# Altium PCB motherboard2.PcbDoc
Units mil, origin at the board's own origin, x right, y up, seen from the top; angles counter-clockwise.
Board outline 2700 x 5200 mil, 2 copper layers (Top Layer, Bottom Layer); 45 components, 61 nets, 238 pads, 22 vias.
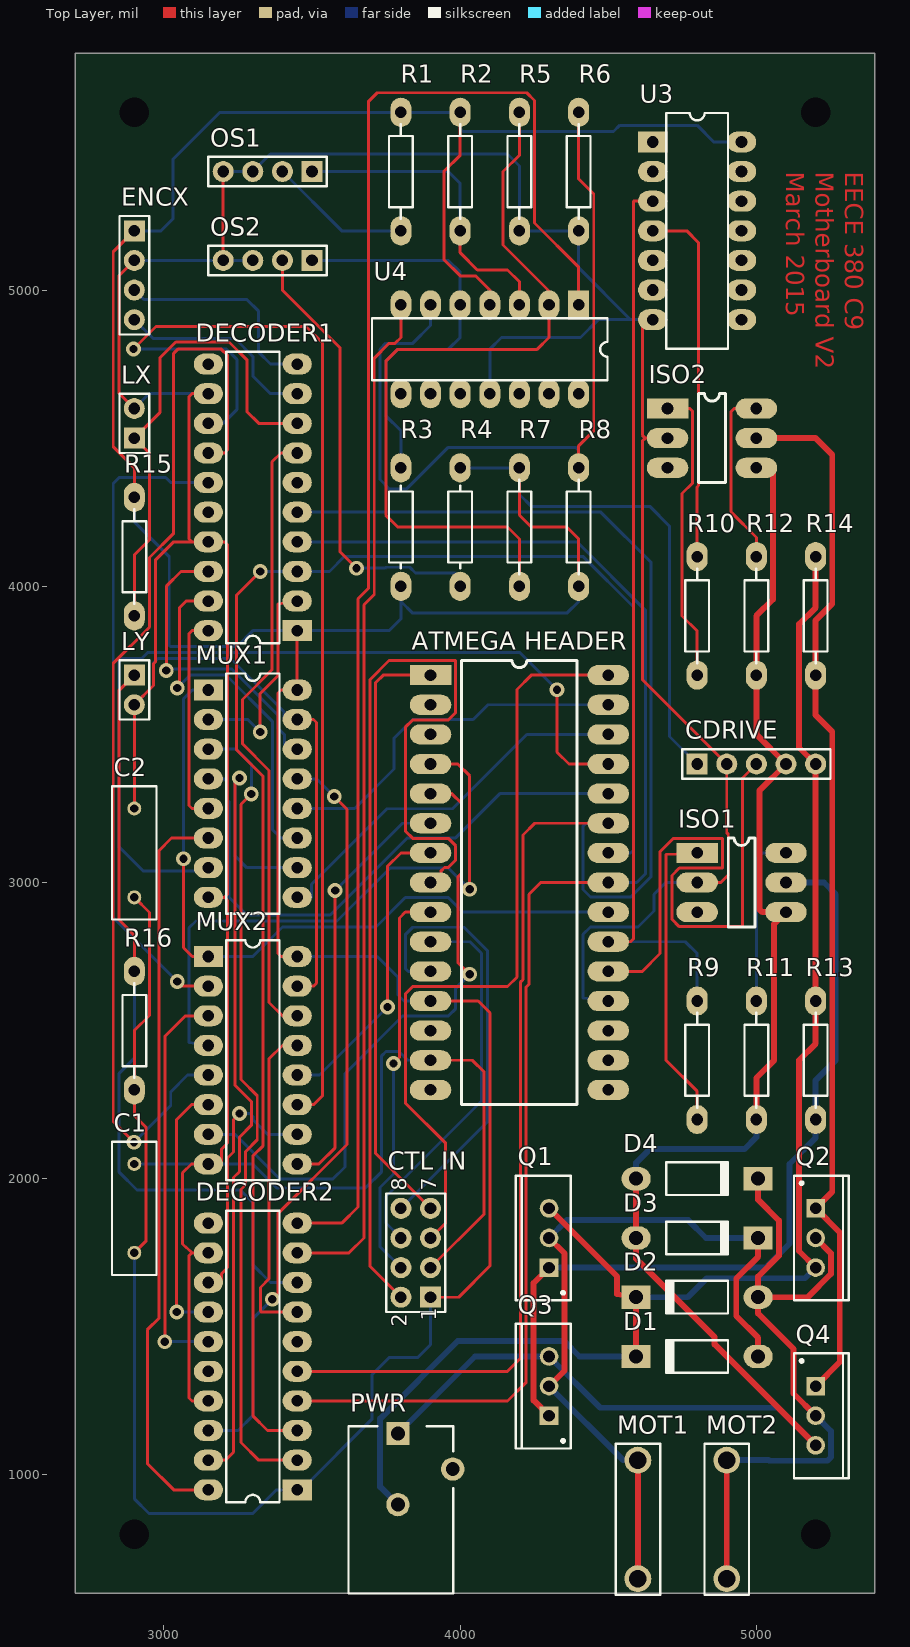
[diagram p0: Top Layer view]
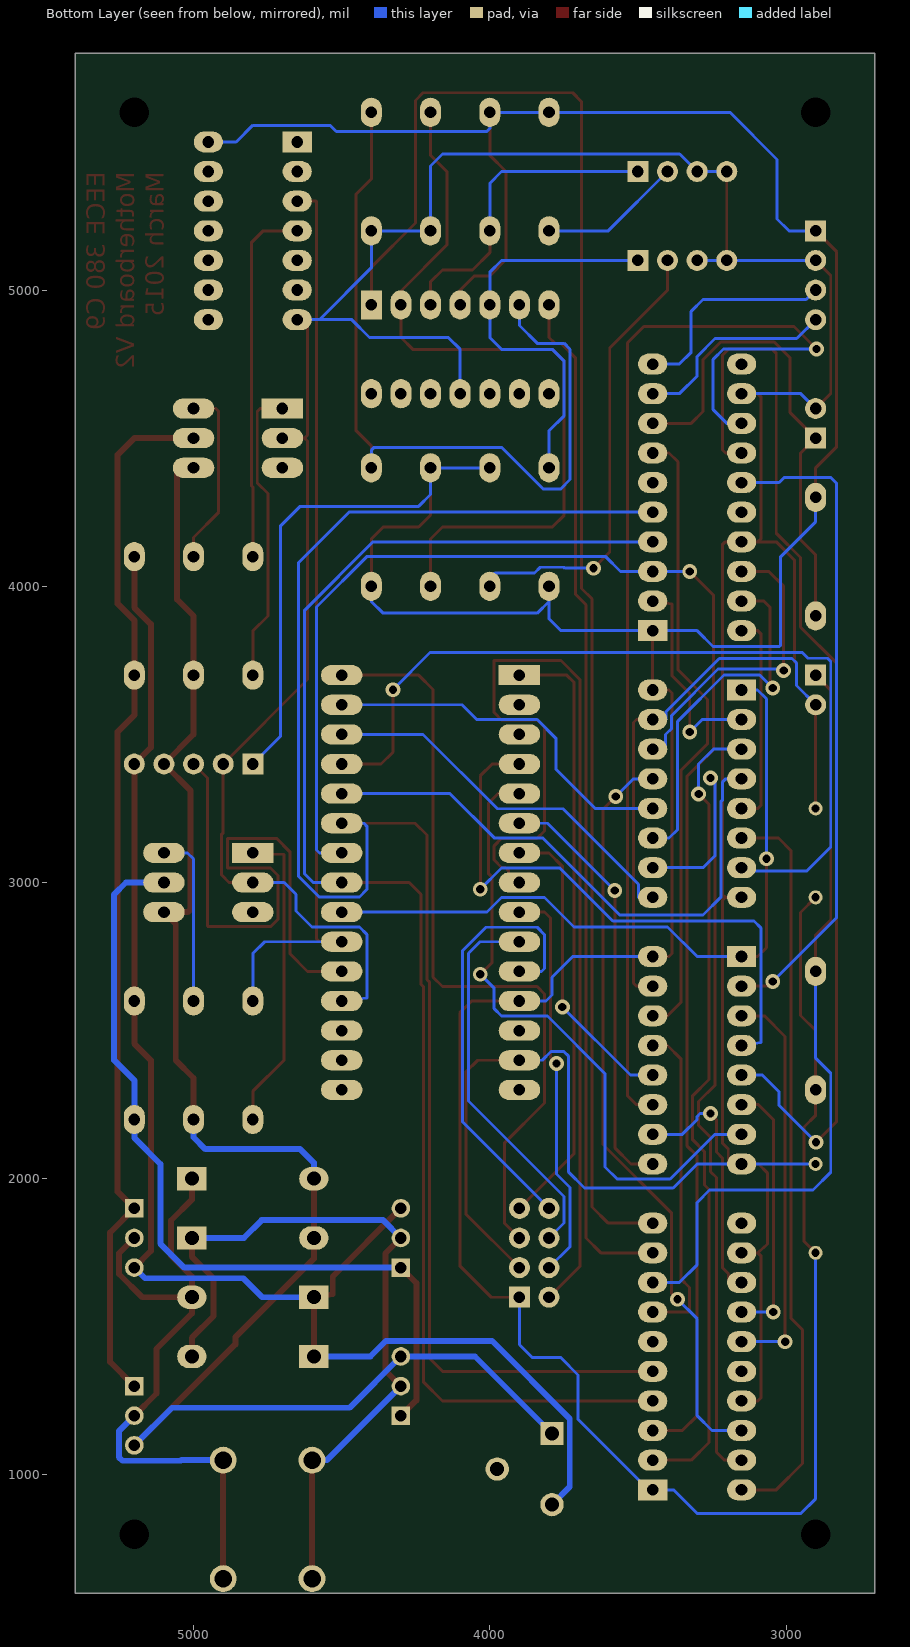
[diagram p1: Bottom Layer view, seen from below]

## Layer stack, top to bottom
Top Solder: solder mask 0.4, Solder Resist, Dk 3.5
Top Layer: signal copper 1.4
Dielectric 1: dielectric 12.6, FR-4, Dk 4.8
Bottom Layer: signal copper 1.4
Bottom Solder: solder mask 0.4, Solder Resist, Dk 3.5

## Board outline
2700,600 5400,600 5400,5800 2700,5800

## Design rules (kind name [scope] priority, off if disabled: settings)
Clearance [All] p1: gap=10
PolygonConnect [All] p1: connectstyle=Relief reliefconductorwidth=10 reliefentries=4 polygonreliefangle="90 Angle" airgapwidth=10
RoutingVias [All] p1: holewidth=28 width=50 viastyle="Through Hole" minholewidth=28 minwidth=50 maxholewidth=28 maxwidth=50
SolderMaskExpansion [All] p1: expansion=4
UnpouredPolygon [All] p1: allowunpoured=FALSE
Width POWPOWPOWER [InNet('VPOWER') or InNet('PGND') or InNet('HV1') or InNet('HV2') or InNet('SIG') or InNet('S\I\G\')] p1: maxlimit=20 minlimit=15 preferedwidth=20
Width [All] p2: maxlimit=10 minlimit=10 preferedwidth=10
29 further rules are at their usual default settings.

## Classes and differential pairs
component class opticalDecoder: OS1 OS2 R1 R2 R3 R4 R5 R6 R7 R8 U4
component class currentDriver: D1 D2 D3 D4 ISO1 ISO2 MOT1 MOT2 Q1 Q2 Q3 Q4 R9 R10 R11 R12 R13 R14 U3

## Components (designator, comment, footprint, x,y, rotation, side; value= is the part's Value field where it differs from the comment)
"ATMEGA HEADER" "NanoHeader" DIP30W 3900,3700 r0 top
C1 "" RAD-0.3 2900,1900 r270 top
C2 "" RAD-0.3 2900,3100 r270 top
CDRIVE "Commercial driver" HDR1X5_LGE1.0 4800,3400 r0 top
"CTL IN" "To arm controller" HDR2X4_LGE1.0 3900,1600 r90 top
D1 "1N4005" DO-41_XLGE1.2 4800,1400 r180 top
D2 "1N4005" DO-41_XLGE1.2 4800,1600 r180 top
D3 "1N4005" DO-41_XLGE1.2 4800,1800 r0 top
D4 "1N4005" DO-41_XLGE1.2 4800,2000 r0 top
DECODER1 "HCTL2022" N020D_LGE1.0 3300,4300 r90 top
DECODER2 "HCTL2022" N020D_LGE1.0 3300,1400 r90 top
ENCX "Encoder X" HDR1X4_LGE1.0 2900,5200 r270 top
ISO1 "4N35" DIP6LGE 4800,3100 r0 top
ISO2 "4N35" DIP6LGE 4700,4600 r0 top
LX "Limit switch X" HDR1X2_LGE1.0 2900,4500 r90 top
LY "Limit switch Y" HDR1X2_LGE1.0 2900,3700 r270 top
MOT1 "C-Ban" Ban1cm_2XLGE1.5 4600,900 r270 top
MOT2 "Ban" Ban1cm_2XLGE1.5 4900,900 r270 top
MUX1 "74HC257" DIP16_LGE1.0 3300,3300 r270 top
MUX2 "74HC257" DIP16_LGE1.0 3300,2400 r270 top
OS1 "C-Hdr1x4" HDR1X4_LGE1.0 3500,5400 r180 top
OS2 "C-Hdr1x4" HDR1X4_LGE1.0 3500,5100 r180 top
PWR "Power in" KLD_XLGE1.2 3800,600 r90 top
Q1 "T-PChan3.3" TO-220AB 4300,1800 r90 top
Q2 "T-PChan3.3" TO-220AB 5200,1800 r270 top
Q3 "T-NChan3.3" TO-220AB 4300,1300 r90 top
Q4 "T-NChan3.3" TO-220AB 5200,1200 r270 top
R1 "220" Res10mm_LGE1.0 3800,5400 r90 top
R2 "10K" Res10mm_LGE1.0 4000,5400 r90 top
R3 "10K" Res10mm_LGE1.0 3800,4200 r270 top
R4 "220" Res10mm_LGE1.0 4000,4200 r90 top
R5 "200K" Res10mm_LGE1.0 4200,5400 r90 top
R6 "200K" Res10mm_LGE1.0 4400,5400 r90 top
R7 "235K" Res10mm_LGE1.0 4200,4200 r90 top
R8 "235K" Res10mm_LGE1.0 4400,4200 r270 top
R9 "-Res" Res10mm_LGE1.0 4800,2400 r90 top
R10 "" Res10mm_LGE1.0 4800,3900 r90 top
R11 "G-Res" Res10mm_LGE1.0 5000,2400 r90 top
R12 "G-Res" Res10mm_LGE1.0 5000,3900 r90 top
R13 "G-Res" Res10mm_LGE1.0 5200,2400 r90 top
R14 "G-Res" Res10mm_LGE1.0 5200,3900 r90 top
R15 "" Res10mm_LGE1.0 2900,4100 r90 top
R16 "" Res10mm_LGE1.0 2900,2500 r270 top
U3 "D-Not" DIP14_LGE1.0 4800,5200 r270 top
U4 "O-OpAmp074" DIP14_LGE1.0 4100,4800 r180 top

## Footprints (in the part's own frame and the unit in brackets; to place one, negate y for a bottom-side part, rotate by r counter-clockwise, add the part's x,y. Pads: shape width x height; smd on the part's side, far side on the other; paste and mask are expansions set on the pad)
Ban1cm_2XLGE1.5 [mm] "Banana plug fem, Thru-Hole; 2 Leads"
  round 2.3 hole 1.5: 1(-3.81,0) 2(6.35,0)
  silkscreen extent -5.21,-1.91 7.75,1.91
DIP6LGE [mil]
  rect 140x68 hole 39.37: 1(0,0)
  oval 140x68 hole 39.37: 2(0,-100) 3(0,-200) 4(300,-200) 5(300,-100) 6(300,0)
  silkscreen extent 105,-250 195,50
DIP14_LGE1.0 [mm] "DIP; 14 Leads; Row Spacing 7.62 mm; Pitch 2.54 mm"
  rect 1.8x2.5 hole 1: 1(-7.62,-3.81)
  oval 1.8x2.5 hole 1: 2(-5.08,-3.81) 3(-2.54,-3.81) 4(0,-3.81) 5(2.54,-3.81) 6(5.08,-3.81) 7(7.62,-3.81) 8(7.62,3.81) 9(5.08,3.81) 10(2.54,3.81) 11(0,3.81) 12(-2.54,3.81) 13(-5.08,3.81) 14(-7.62,3.81)
  silkscreen extent -10.1,-2.65 10.1,2.65
DIP16_LGE1.0 [mm] "DIP; 16 Leads; Row Spacing 7.62 mm; Pitch 2.54 mm"
  rect 1.8x2.5 hole 1: 1(-8.89,-3.81)
  oval 1.8x2.5 hole 1: 2(-6.35,-3.81) 3(-3.81,-3.81) 4(-1.27,-3.81) 5(1.27,-3.81) 6(3.81,-3.81) 7(6.35,-3.81) 8(8.89,-3.81) 9(8.89,3.81) 10(6.35,3.81) 11(3.81,3.81) 12(1.27,3.81) 13(-1.27,3.81) 14(-3.81,3.81) 15(-6.35,3.81) 16(-8.89,3.81)
  silkscreen extent -10.3,-2.29 10.3,2.29
DIP30W [mil]
  rect 140x68 hole 39.37: 1(0,0)
  oval 140x68 hole 39.37: 2(0,-100) 3(0,-200) 4(0,-300) 5(0,-400) 6(0,-500) 7(0,-600) 8(0,-700) 9(0,-800) 10(0,-900) 11(0,-1000) 12(0,-1100) 13(0,-1200) 14(0,-1300) 15(0,-1400) 16(600,-1400) 17(600,-1300) 18(600,-1200) 19(600,-1100) 20(600,-1000) 21(600,-900) 22(600,-800) 23(600,-700) 24(600,-600) 25(600,-500) 26(600,-400) 27(600,-300) 28(600,-200) 29(600,-100) 30(600,0)
  silkscreen extent 105,-1450 495,50
DO-41_XLGE1.2 [mm] "Diode, Axial; Body 5.2 x 2.7 mm (LxDia. max), Lead Dia. 0.86 mm (max)"
  oval 2.5x2 hole 1.2: 1(-5.23,0)
  rect 2.5x2 hole 1.2: 2(5.23,0)
  silkscreen extent -2.65,-1.4 2.75,1.4
HDR1X2_LGE1.0 [mm] "Connector; Header; 2 Position"
  rect 1.8x1.8 hole 1: 1(0,0)
  round 1.8 hole 1: 2(2.54,0)
  silkscreen extent -1.27,-1.27 3.81,1.27
HDR1X4_LGE1.0 [mm] "Connector; Header; 4 Position"
  rect 1.8x1.8 hole 1: 1(0,0)
  round 1.8 hole 1: 2(2.54,0) 3(5.08,0) 4(7.62,0)
  silkscreen extent -1.27,-1.27 8.89,1.27
HDR1X5_LGE1.0 [mm] "Connector; Header; 6 Position"
  rect 1.8x1.8 hole 1: 1(0,0)
  round 1.8 hole 1: 2(2.54,0) 3(5.08,0) 4(7.62,0) 5(10.16,0)
  silkscreen extent -1.27,-1.27 11.43,1.27
HDR2X4_LGE1.0 [mm] "Connector; Header; 4x2 Position"
  rect 1.8x1.8 hole 1: 1(0,0)
  round 1.8 hole 1: 2(0,2.54) 3(2.54,0) 4(2.54,2.54) 5(5.08,0) 6(5.08,2.54) 7(7.62,0) 8(7.62,2.54)
  silkscreen extent -1.27,-1.27 8.89,3.81
KLD_XLGE1.2 [mm] "DC Power Jack, PCB Mount"
  rect 2x2 hole 1.2: 1(13.716,0.254)
  round 2 hole 1.2: 2(7.62,0.254) 3(10.668,-4.445)
  silkscreen extent 0,-4.5 14.35,4.5
N020D_LGE1.0 [mm] "DIP; 20 Leads; Row Spacing 7.62 mm; Pitch 2.54 mm"
  rect 1.8x2.5 hole 1: 1(-11.43,-3.81)
  oval 1.8x2.5 hole 1: 2(-8.89,-3.81) 3(-6.35,-3.81) 4(-3.81,-3.81) 5(-1.27,-3.81) 6(1.27,-3.81) 7(3.81,-3.81) 8(6.35,-3.81) 9(8.89,-3.81) 10(11.43,-3.81) 11(11.43,3.81) 12(8.89,3.81) 13(6.35,3.81) 14(3.81,3.81) 15(1.27,3.81) 16(-1.27,3.81) 17(-3.81,3.81) 18(-6.35,3.81) 19(-8.89,3.81) 20(-11.43,3.81)
  silkscreen extent -12.5,-2.29 12.5,2.29
RAD-0.3 [mm] "Radial Cap, Thru-Hole; 2 Leads; 0.3 in Pin Spacing"
  round 1.2 hole 0.7: 1(-3.81,0) 2(3.81,0)
  silkscreen extent -5.71,-1.91 5.71,1.91
Res10mm_LGE1.0 [mm] "Axial Device, Thru-Hole; 2 Leads; 0.4 in Pin Spacing"
  oval 2.5x1.8 hole 1: 1(-5.08,0) 2(5.08,0)
  silkscreen extent -4.06,-1.02 4.06,1.02
TO-220AB [mm] "TO, Thru-Hole, Vertical, Heatsink Mounted; 3 In-Line Leads; Pitch 2.54 mm"
  rect 1.6x1.6 hole 1: 1(-2.54,0)
  round 1.6 hole 1: 2(0,0) 3(2.54,0)
  silkscreen extent -5.35,-1.85 5.35,2.85, body extent -5.4,-1.9 5.4,2.9, height 19.3

## Part data
C1 C2: library part Cap, "Capacitor"
CDRIVE: library part C-Hdr1x5, "Header, 6-Pin"
"CTL IN": library part C-Hdr2x4, "Header, 4-Pin, Dual row"
D1 D2 D3 D4: library part T-Diode-1N4005, "diode"
ENCX: library part C-Hdr1x4, "Header, 4-Pin"
LX LY: library part C-Hdr1x2, "Header, 2-Pin"
MOT1: "Banana plug fem"
MOT2: library part C-Ban, "Banana plug fem"
OS1 OS2: "Header, 4-Pin"
PWR: "Low Voltage Power Supply Connector"
Q1 Q2: "P-Channel Power MOSFET"
Q3 Q4: "N-Channel Power MOSFET"
R1 R2 R3 R4: library part Res1, "Resistor"
R5 R6 R7 R8 R9 R10 R15 R16: library part G-Res, "resistor (specify value)"
R11 R12 R13 R14: "resistor (specify value)"
U3: "hex NOT gate (inverter)"
U4: "op amp (TL074)"

## Free pads (board coordinates)
  round 60 hole 100: 2(2900,800) 2(2900,5600) 2(5200,800) 2(5200,5600)

## Via types
v1: diameter 50, hole 28, Top Layer to Bottom Layer, 22 vias

## Nets (pads, with @x,y where several pads share a name; then routed paths per layer and width w, separated by ;. In a path a pad name is that pad's centre, name@x,y a point inside that pad or via, vN(x,y) a via of type N, cw(c..) or ccw(c..) an arc to the next point about the centre after c; other vN are vias at no path point)
ALT1: "ATMEGA HEADER.30" "CTL IN.5" | length 2601
  Top Layer w10: 3900,1800 3951,1851 3951,2120 3815,2256 3815,2624 3840,2649 4160,2649 4191.5,2680.5 4191.5,3651.5 4240,3700 4500,3700
ALT2: "ATMEGA HEADER.1" "CTL IN.7" | length 2047
  Top Layer w10: 3900,1900 3715,2085 3715,3675 3740,3700 3900,3700
BYTE: "ATMEGA HEADER.23" DECODER1.4 DECODER2.4 | length 5032.1
  Top Layer w10: DECODER2.4 4160,1250 4223,1313 4223,2647.51 4232,2656.51 4232,2960 4272,3000 4500,3000
  Bottom Layer w10: DECODER1.4 4394,4150 4625,3919 4625,3029 4596,3000 4500,3000
CHAX: DECODER1.10 ENCX.3 | length 734.4
  Bottom Layer w10: ENCX.3 2932,4968 3280,4968 3320,4928 3320,4790 3360,4750 DECODER1.10
CHAY: DECODER2.10 U4.1 | length 5309.2
  Top Layer w10: DECODER2.10 3600,1850 3655,1905 3655,3957.5 3690,3992.5 3690,5636 3720,5666 4225,5666 4251,5640 4251,5226 4400,5077 U4.1
CHBX: DECODER1.9 ENCX.4 | length 692.2
  Bottom Layer w10: ENCX.4 2964,4836 3240,4836 3300,4776 3300,4710 3360,4650 DECODER1.9
CHBY: DECODER2.9 U4.7 | length 3459.2
  Top Layer w10: DECODER2.9 3625,1750 3675,1800 3675,3937.5 3710,3972.5 3710,4770 3760,4820 3780,4820 3800,4840 U4.7
CLOCK: "ATMEGA HEADER.24" DECODER1.3 DECODER2.3 | length 5366.7
  Top Layer w10: v1(3325,4050) 3245,3970 3245,3448 3335,3358 3335,2111.43 3300,2076.43 3300,1200 3350,1150 DECODER2.3
  Bottom Layer w10: v1(3325,4050) DECODER1.3 3559,4050 3610,4101 4414,4101 4585,3930 4585,3110 4575,3100 4500,3100
D0: "ATMEGA HEADER.26" MUX1.4 | length 1935.2
  Bottom Layer w10: MUX1.4 3203.74,3350 3213.74,3340 3213.74,3279.12 3220,3272.86 3220,2950 3280,2890 3561.26,2890 3822.26,3151 3985,3151 4134,3300 4500,3300
D1: "ATMEGA HEADER.27" MUX1.7 | length 2913.9
  Top Layer w10: v1(4327,3651) 4327,3440 4367,3400 4500,3400
  Bottom Layer w10: MUX1.7 3105.79,3050 3105.79,3039.57 2929.43,3039.57 2849,3120 2849,3746 2860,3757 2925.56,3757 2945,3776.44 4201.56,3776.44 v1(4327,3651)
D2: "ATMEGA HEADER.28" MUX1.9 | length 1303.4
  Bottom Layer w10: MUX1.9 3497.85,2950 3497.85,2993.73 3753.12,3249 3974,3249 4225,3500 4500,3500
D3: "ATMEGA HEADER.29" MUX1.12 | length 1255.9
  Bottom Layer w10: MUX1.12 3644,3250 3777,3383 3777,3487 3840,3550 4044,3550 4094,3600 4500,3600
D4: "ATMEGA HEADER.4" MUX2.4 | length 2044.8
  Top Layer w10: 3900,3400 3992,3400 4032,3360 v1(4032,2977)
  Bottom Layer w10: MUX2.4 3085,2460 3085,2847 3108,2870 3584.65,2870 3763.65,3049 3960,3049 v1(4032,2977)
D5: "ATMEGA HEADER.5" MUX2.7 | length 2173.1
  Top Layer w10: 3900,3300 3972,3300 4005,3267 4005,3031 3992,3018 3992,2730 v1(4032,2690)
  Bottom Layer w10: MUX2.7 3240,2150 3391,1999 3570,1999 3611,2040 3611,2354.64 3805.36,2549 3960,2549 3985,2574 3985,2643 v1(4032,2690)
D6: "ATMEGA HEADER.6" MUX2.9 | length 1434.8
  Top Layer w10: MUX2.9 3523,2050 3578,2105 v1(3578,2973)
  Bottom Layer w10: v1(3578,2973) 3805,3200 3900,3200
D7: "ATMEGA HEADER.7" MUX2.12 | length 1038.9
  Top Layer w10: v1(3755,2580) 3755,3055 3800,3100 3900,3100
  Bottom Layer w10: MUX2.12 3525,2350 v1(3755,2580)
DGND: "ATMEGA HEADER.14" "ATMEGA HEADER.19" "CTL IN.3" C1.1 C2.1 CDRIVE.2 DECODER1.12 DECODER1.17 DECODER2.12 DECODER2.17 ENCX.2 ISO1.2 ISO2.2 LX.2 LY.2 MUX1.8 MUX1.15 MUX2.8 MUX2.15 OS1.3 OS1.4 OS2.3 OS2.4 R5.1 R6.1 U3.7 U4.11 | length 16195.8
  Top Layer w10: C2.1 LY.2 2965,3665 2965,3738.44 2971,3744.44 2971,4088 3033,4150 3095,4150 ; LX.2 2849,4651 2849,5049 ENCX.2 ; DECODER2.17 3095,1250 3085,1260 3085,1740 3095,1750 ; DECODER2.12 3095,1750 ; MUX1.8 3205,2950 ; DECODER1.12 3095,4650 3085,4640 3085,4160 3095,4150 ; OS2.4 OS1.4 ; MUX2.15 3505,2650 3515,2660 3515,3540 3505,3550 MUX1.15 ; 3900,1700 4081,1881 4081,2360 4041,2400 3900,2400 ; U3.7 4615,4900 4615,4510 4625,4500 ; ISO2.2 4625,4500 ; ISO1.2 4880,3000 4905,3025 4905,3163 4900,3168 CDRIVE.2 4615,3685 4615,4490 4625,4500 ; 3095,1750 3063,1780 3063,2020 3093,2050 MUX2.8 3195,2050 3195,2100.5 3215,2120.5 3215,2940 3205,2950 ; 3095,4150 DECODER1.17 3205,4150 3214.86,4140.14 3214.86,2959.86 3205,2950
  Bottom Layer w10: C1.1 MUX2.8 3300,2050 3381,1969 3680,1969 3735,2024 3735,2414.86 3750,2429.86 3793.28,2429.86 3823.14,2400 3900,2400 ; LY.2 2965,3665 2965,3741.44 2980,3756.44 3225.05,3756.44 3405.79,3575.71 3405.79,3550 MUX1.15 ; LX.2 2950,4650 DECODER1.12 ; ENCX.2 OS2.4 OS2.3 ; OS1.4 OS1.3 3359,5459 4160,5459 4200,5419 R5.1 R6.1 4400,5075 4575,4900 ; U4.11 4100,4800 4140,4840 4406,4840 4466,4900 4575,4900 ; 4500,2600 4415,2610 4415,2825 4440,2850 4600,2850 4654,2904 4654,2960 4694,3000 ISO1.2 ; U3.7 4575,4900
ENABLE: "ATMEGA HEADER.25" DECODER1.5 DECODER2.5 | length 5743.6
  Top Layer w10: DECODER2.5 4160,1350 4203,1393 4203,2663 4212,2672 4212,3160 4252,3200 4500,3200
  Bottom Layer w10: DECODER1.5 4475,4250 4645,4080 4645,3020 4576,2951 4440,2951 4415,2976 4415,3190 4425,3200 4500,3200
HV1: D2.1 D4.2 MOT2.1 MOT2.2 Q2.2 Q4.2 | length 2278.7
  Top Layer w20: MOT2.2 MOT2.1 ; D4.2 5005.91,1929.09 5076,1859 5076,1740.09 5005.91,1670 D2.1 ; Q4.2 5125,1275 5125,1425.91 5005.91,1545 D2.1 ; Q2.2 5251.5,1748.5 5251.5,1678.5 5173,1600 D2.1
  Bottom Layer w20: MOT2.1 5041,1050 5043,1048 5240,1048 5252,1060 5252,1148 Q4.2
HV2: D1.1 D3.2 MOT1.1 MOT1.2 Q1.2 Q3.2 | length 2563.5
  Top Layer w20: Q3.2 4352,1352 4352,1748 Q1.2 ; MOT1.2 MOT1.1 ; D1.1 5005.91,1463 4932,1536.91 4932,1663 5005.91,1736.91 D3.2
  Bottom Layer w20: Q3.2 4550,1050 MOT1.1 ; Q1.2 4360,1860 4770,1860 4830,1800 D3.2
"M1 SERIAL": "ATMEGA HEADER.20" CDRIVE.3 | length 2016.5
  Top Layer w10: 4500,2700 4615,2700 4675,2760 4675,3104 4720,3149 4885,3149 4885,3049 4740,3049 4715,3024 4715,2876 4740,2851 4951,2851 4953,2853 4953,3353 CDRIVE.3
"M2 PWM": "ATMEGA HEADER.21" R9.2 U3.3 | length 3120.1
  Top Layer w10: 4500,2800 4575,2800 4585,2810 4585,5299 4586,5300 U3.3
  Bottom Layer w10: 4500,2800 4760,2800 4800,2760 R9.2
"NetATMEGA HEADER_8": "ATMEGA HEADER.8" "CTL IN.2" | length 3538.7
  Top Layer w10: 3800,1600 3695,1705 3695,3684 3760,3749 3985,3749 3985,3574 3960,3549 3840,3549 3815,3524 3815,3174 3840,3149 3960,3149 3985,3124 3985,3076 3960,3051 3947,3051 3936,3040 3936,3000 3900,3000
"NetATMEGA HEADER_9": "ATMEGA HEADER.9" "CTL IN.4" | length 1349.6
  Top Layer w10: v1(3775,2389) 3795,2409 3795,2880 3815,2900 3900,2900
  Bottom Layer w10: v1(3775,2389) 3775,2015.87 3729.57,1970.43 3729.57,1770.43 3800,1700
"NetATMEGA HEADER_10": "ATMEGA HEADER.10" "CTL IN.6" | length 1303.6
  Bottom Layer w10: 3800,1800 3749.57,1850.43 3749.57,1940 4072,2262.43 4072,2761 4033,2800 3900,2800
"NetATMEGA HEADER_11": "ATMEGA HEADER.11" "CTL IN.8" | length 1514.2
  Bottom Layer w10: 3800,1900 4092,2192 4092,2770 4013,2849 3840,2849 3815,2824 3815,2710 3825,2700 3900,2700
NetDECODER1_8: DECODER1.8 LX.1 R15.1 | length 1651.7
  Top Layer w10: R15.1 2900,4105.74 2951,4156.74 2951,4449 LX.1 2986,4586 2986,4771 3040,4825 3220,4825 3280,4765 3280,4590 3320,4550 DECODER1.8
NetDECODER2_8: DECODER2.8 LY.1 R16.1 | length 2619.5
  Top Layer w10: R16.1 2900,2822 2849,2873 2849,3649 LY.1
  Bottom Layer w10: R16.1 2900,2407 2849,2356 2849,2022 2909,1962 3258,1962 3300,1920 3300,1710 3360,1650 DECODER2.8
NetISO1_1: ISO1.1 R9.1 | length 1043.6
  Top Layer w10: R9.1 4800,2295 4695,2400 4695,3095 ISO1.1
NetISO1_6: ISO1.6 R11.2 | length 588.3
  Bottom Layer w10: R11.2 5000,3080 5020,3100 ISO1.6
NetISO2_1: ISO2.1 R10.1 | length 1015.2
  Top Layer w10: ISO2.1 4775,4600 4785,4590 4785,4349 4749,4313 4749,3900 4800,3849 R10.1
NetISO2_6: ISO2.6 R12.2 | length 614.4
  Top Layer w10: R12.2 5000,4165 4915,4250 4915,4590 4925,4600 ISO2.6
NetOS1_1: OS1.1 R2.1 U4.3 | length 1069.2
  Top Layer w10: R2.1 4000,5126 4058,5068 4160,5068 4200,5028 U4.3
  Bottom Layer w10: OS1.1 3960,5400 4000,5360 R2.1
NetOS1_2: OS1.2 R1.1 | length 482.8
  Bottom Layer w10: OS1.2 3600,5200 R1.1
NetOS2_1: OS2.1 R3.1 U4.5 | length 1401.8
  Bottom Layer w10: OS2.1 3960,5100 4000,5060 U4.5 4000,4840 3960,4800 3789,4800 3749,4760 3749,4576 3800,4525 R3.1
NetOS2_2: OS2.2 R4.1 | length 1536.9
  Top Layer w10: OS2.2 3400,4999 3595,4804 3595,4116 v1(3650,4061)
  Bottom Layer w10: v1(3650,4061) 3746.79,4061 3750,4064.21 3829.79,4064.21 3849,4045 3983,4045 4000,4028 R4.1
NetR5_2: R5.2 R7.1 U4.2 | length 2595.3
  Top Layer w10: R7.1 4200,4160 4160,4200 3789,4200 3749,4240 3749,4760 3789,4800 4260,4800 4300,4840 U4.2 4300,4997 4145,5152 4145,5400 4200,5455 R5.2
NetR6_2: R6.2 R8.1 U4.6 | length 2761.4
  Top Layer w10: R8.1 4400,4474 4451,4525 4451,5324 4400,5375 R6.2
  Bottom Layer w10: U4.6 3900,4880 3840,4820 3749,4820 3729,4800 3729,4360 3760,4329 3820,4329 3960,4469 4390,4469 4400,4459 R8.1
NetR10_2: R10.2 U3.4 | length 1233.6
  Top Layer w10: U3.4 4765,5200 4805,5160 4805,4340 4800,4335 R10.2
PGND: CDRIVE.4 D3.1 D4.1 ISO1.4 ISO2.4 PWR.1 Q3.3 Q4.3 R11.1 R12.1 | length 5832
  Top Layer w20: D4.1 D3.1 4594.09,1729.91 4859,1465 4859,1441 Q4.3 ; R11.1 5000,2340 5060,2400 5060,2860 ISO1.4 5020,2900 5010,2910 5010,3310 CDRIVE.4 5000,3500 R12.1 5000,3900 5056,3956 5056,4400 ISO2.4
  Bottom Layer w20: PWR.1 4050,1400 Q3.3 4473,1227 5073,1227 Q4.3 ; D4.1 4594.09,2054.09 4640,2100 4960,2100 5000,2140 R11.1
S\I\G\: ISO2.5 Q2.1 Q4.1 R14.1 | length 3560.3
  Top Layer w20: ISO2.5 5200,4500 5256,4444 5256,3941 5200,3885 R14.1 5200,3565 5256,3509 5256,1956 Q2.1 5281.5,1818.5 5281.5,1381.5 Q4.1
"SEL X/Y": "ATMEGA HEADER.22" MUX1.1 MUX2.1 | length 2485.6
  Top Layer w10: v1(3066,3080) 3066,2780 3096,2750 MUX2.1
  Bottom Layer w10: v1(3066,3080) 3066,3620 3096,3650 MUX1.1 ; MUX2.1 3300,2750 3400,2850 3716,2850 3815,2949 3960,2949 4009,2900 4500,2900
SIG: ISO1.5 Q1.1 Q3.1 R13.1 | length 2816.8
  Top Layer w20: Q3.1 4248,1252 4248,1648 Q1.1
  Bottom Layer w20: Q1.1 5031,1700 5112,1781 5112,2050 5200,2138 R13.1 5200,2332 5268,2400 5268,2960 5228,3000 ISO1.5
V1: "ATMEGA HEADER.12" "CTL IN.1" C1.2 C2.2 CDRIVE.1 DECODER1.1 DECODER2.1 ENCX.1 MUX1.16 MUX2.16 R1.2 R2.2 R3.2 R4.2 R7.2 R8.2 R15.2 R16.2 U3.14 U4.4 | length 15243.2
  Top Layer w10: C1.2 2939,1789 2939,2175 2900,2214 R16.2 2900,2500 2951,2551 2951,2899 C2.2 ; R15.2 2900,4400 2829,4471 2829,5129 ENCX.1 ; MUX2.16 3395,2750 3385,2760 3385,3640 3395,3650 MUX1.16 DECODER1.1 ; 3900,1600 3995,1600 4101,1706 4101,2560 4061,2600 3900,2600 ; R2.2 4000,5455 3945,5400 3945,5103 4000,5048 4052,5048 4100,5000 U4.4 ; R7.2 4200,4240 4240,4200 4360,4200 4400,4160 R8.2
  Bottom Layer w10: C1.2 2900,920 2950,870 3300,870 3380,950 DECODER2.1 3464,950 3701.78,1187.78 3701.78,1337.78 3760,1396 3856,1396 3900,1440 3900,1600 ; R15.2 2900,4218 3018,4100 3018,3800 3021.56,3796.44 3246.44,3796.44 3300,3850 DECODER1.1 3760,3850 3800,3890 3800,3949 ; ENCX.1 2990,5200 3030,5240 3030,5441 3189,5600 R1.2 R2.2 4000,5545 4010,5535 4518,5535 4539,5556 4800,5556 4856,5500 U3.14 ; MUX2.16 3720,2750 3790,2680 3790,2620 3810,2600 3900,2600 ; R3.2 3800,3949 ; R4.2 R7.2 4200,4310 4240,4270 4640,4270 4707,4203 4707,3493 CDRIVE.1 ; R8.2 4400,3949 4360,3909 3840,3909 3800,3949
VPOWER: CDRIVE.5 D1.2 D2.2 PWR.2 Q1.3 Q2.3 R13.2 R14.2 | length 5099.3
  Top Layer w20: Q1.3 4530,1670 4530,1610 D2.2 D1.2 ; Q2.3 5144,1756 5144,2400 5200,2456 R13.2 CDRIVE.5 5144,3456 5144,3872 5200,3928 R14.2
  Bottom Layer w20: PWR.2 3730,960 3730,1190 3992,1452 4351,1452 4403,1400 D1.2 ; D2.2 4768,1600 4832,1664 5164,1664 Q2.3
X0: DECODER1.2 MUX1.2 | length 715
  Top Layer w10: v1(3325,3508) 3325,3638 3385,3698 3385,3940 DECODER1.2
  Bottom Layer w10: MUX1.2 3283,3550 v1(3325,3508)
X1: DECODER1.20 MUX1.5 | length 718.3
  Top Layer w10: MUX1.5 3095,3250 3085,3260 3085,3840 3095,3850 DECODER1.20
X2: DECODER1.19 MUX1.11 | length 1245.7
  Top Layer w10: v1(3045,3656.65) 3053.33,3664.98 3053.33,3928.33 3075,3950 DECODER1.19
  Bottom Layer w10: v1(3045,3656.65) 3088.78,3700.43 3209.57,3700.43 3365.79,3544.21 3365.79,3179.21 3395,3150 MUX1.11
X3: DECODER1.18 MUX1.14 | length 1057.3
  Top Layer w10: v1(3008,3716) 3008,4000 3058,4050 DECODER1.18
  Bottom Layer w10: v1(3008,3716) 3012.43,3720.43 3229.36,3720.43 3385.79,3564.01 3385.79,3520.21 3406.43,3499.57 3406.43,3450 MUX1.14
X4: DECODER1.15 MUX2.2 | length 2218.4
  Top Layer w10: v1(3045,2666) 3061,2650 MUX2.2
  Bottom Layer w10: v1(3045,2666) 2829,2882 2829,4347 2849,4367 3006,4367 3023,4350 DECODER1.15
X5: DECODER1.14 MUX2.5 | length 3732.7
  Top Layer w10: v1(2899,2123) 2829,2193 2829,3740 2951,3862 2951,4097 3033,4179 3033,4786.43 3047,4800.43 3193.78,4800.43 3214.21,4780 3214.21,4460 3204.21,4450 DECODER1.14
  Bottom Layer w10: v1(2899,2123) 3023,2247 3023,2293 3080,2350 MUX2.5
X6: DECODER1.13 MUX2.11 | length 3980.2
  Top Layer w10: v1(2897,4801) 2973,4877 3480,4877 3535,4822 3535,2280 3505,2250 MUX2.11
  Bottom Layer w10: v1(2897,4801) 3211,4801 3246,4766 3246,4596 3200,4550 DECODER1.13
X7: DECODER1.7 MUX2.14 | length 2114.8
  Top Layer w10: MUX2.14 3400,2550 3355,2595 3355,3378 3265,3468 3265,3618.21 3365,3718.21 3365,4420 3395,4450 DECODER1.7
Y0: DECODER2.2 MUX1.3 | length 2730.6
  Top Layer w10: v1(3295,3299) 3260,3264 3260,2335.43 3315,2280.43 3315,2131.43 3275,2091.43 3275,1978.82 3260,1963.82 3260,1110 3320,1050 DECODER2.2
  Bottom Layer w10: MUX1.3 3245,3450 3295,3400 v1(3295,3299)
Y1: DECODER2.20 MUX1.6 | length 2512
  Top Layer w10: DECODER2.20 3033,950 2944,1039 2944,1490 2983,1529 2983,3107.21 3025.79,3150 MUX1.6
Y2: DECODER2.19 MUX1.10 | length 2921.8
  Top Layer w10: DECODER2.19 3208,1050 3235,1077 3235,2003.82 3255,2023.82 3255,2140.43 3295,2180.43 3295,2260.43 3240,2315.43 3240,3338 v1(3255,3353)
  Bottom Layer w10: v1(3255,3353) 3240,3338 3240,3090 3280,3050 MUX1.10
Y3: DECODER2.18 MUX1.13 | length 2560.1
  Top Layer w10: v1(3366,1593) 3385.79,1612.79 3385.79,1883.79 3618,2116 3618,3247 v1(3575,3290)
  Bottom Layer w10: DECODER2.18 3250,1150 3300,1200 3300,1527 v1(3366,1593) ; MUX1.13 3515,3350 v1(3575,3290)
Y4: DECODER2.15 MUX2.3 | length 1353
  Top Layer w10: v1(3003,1450) 3003,2480 3073,2550 MUX2.3
  Bottom Layer w10: v1(3003,1450) DECODER2.15
Y5: DECODER2.14 MUX2.6 | length 884.7
  Top Layer w10: v1(3043,1550) 3043,2200 3093,2250 MUX2.6
  Bottom Layer w10: v1(3043,1550) DECODER2.14
Y6: DECODER2.13 MUX2.10 | length 869.1
  Top Layer w10: DECODER2.13 3194,1650 3194,1679 3215,1700 3215,2070 3235,2090 3235,2200 v1(3255,2220)
  Bottom Layer w10: v1(3255,2220) 3290,2220 3300,2210 3300,2200 3350,2150 MUX2.10
Y7: DECODER2.7 MUX2.13 | length 1103.3
  Top Layer w10: DECODER2.7 3328.53,1550 3325.79,1552.75 3325.79,1633 3355,1662.21 3355,2405 3400,2450 MUX2.13
pads on no net: "ATMEGA HEADER.2" "ATMEGA HEADER.3" "ATMEGA HEADER.13" "ATMEGA HEADER.15" "ATMEGA HEADER.16" "ATMEGA HEADER.17" "ATMEGA HEADER.18" DECODER1.6 DECODER1.11 DECODER1.16 DECODER2.6 DECODER2.11 DECODER2.16 ISO1.3 ISO2.3 PWR.3 U3.1 U3.2 U3.5 U3.6 U3.8 U3.9 U3.10 U3.11 U3.12 U3.13 U4.8 U4.9 U4.10 U4.12 U4.13 U4.14

## Other copper
Top Layer:
  text "March 2015" at 5100,5400 h60 r270
  text "Motherboard V2" at 5200,5400 h60 r270
  text "EECE 380 C9" at 5300,5400 h60 r270

## Text inside footprints (layer, text, board x,y; h text height)
"CTL IN": Top Overlay "2" at 3820,1500 h50 r90; Top Overlay "1" at 3920,1520 h50 r90; Top Overlay "7" at 3920,1960 h50 r90; Top Overlay "8" at 3820,1960 h50 r90